# Altium PCB TwoMotor.PcbDoc
Units mil, origin at the board's own origin, x right, y up, seen from the top; angles counter-clockwise.
Board outline 2402.34 x 2195.03 mil, 2 copper layers (Top Layer, Bottom Layer); 38 components, 33 nets, 123 pads, 57 vias.
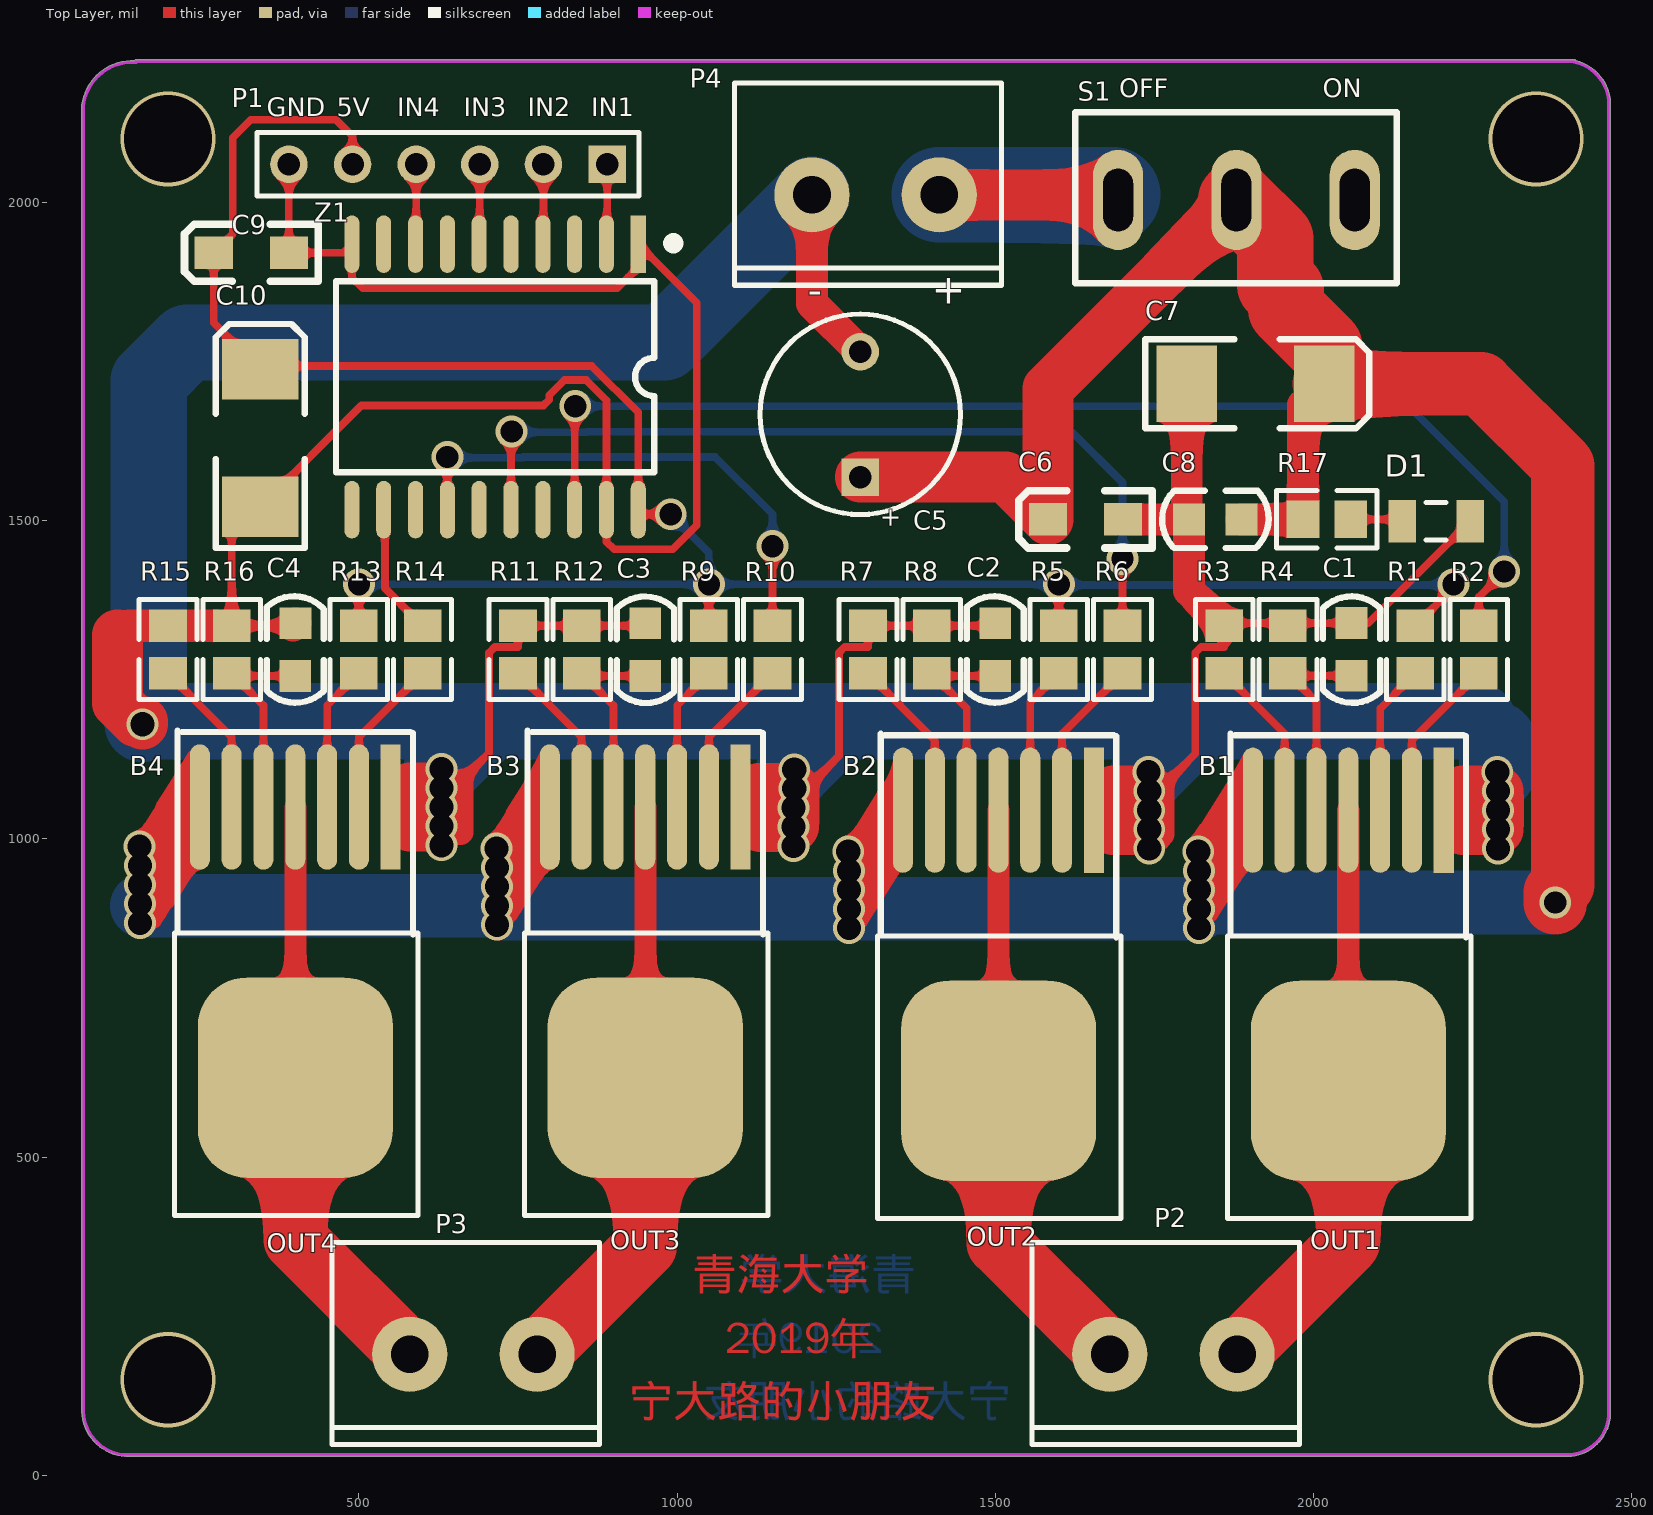
[diagram p0: Top Layer view]
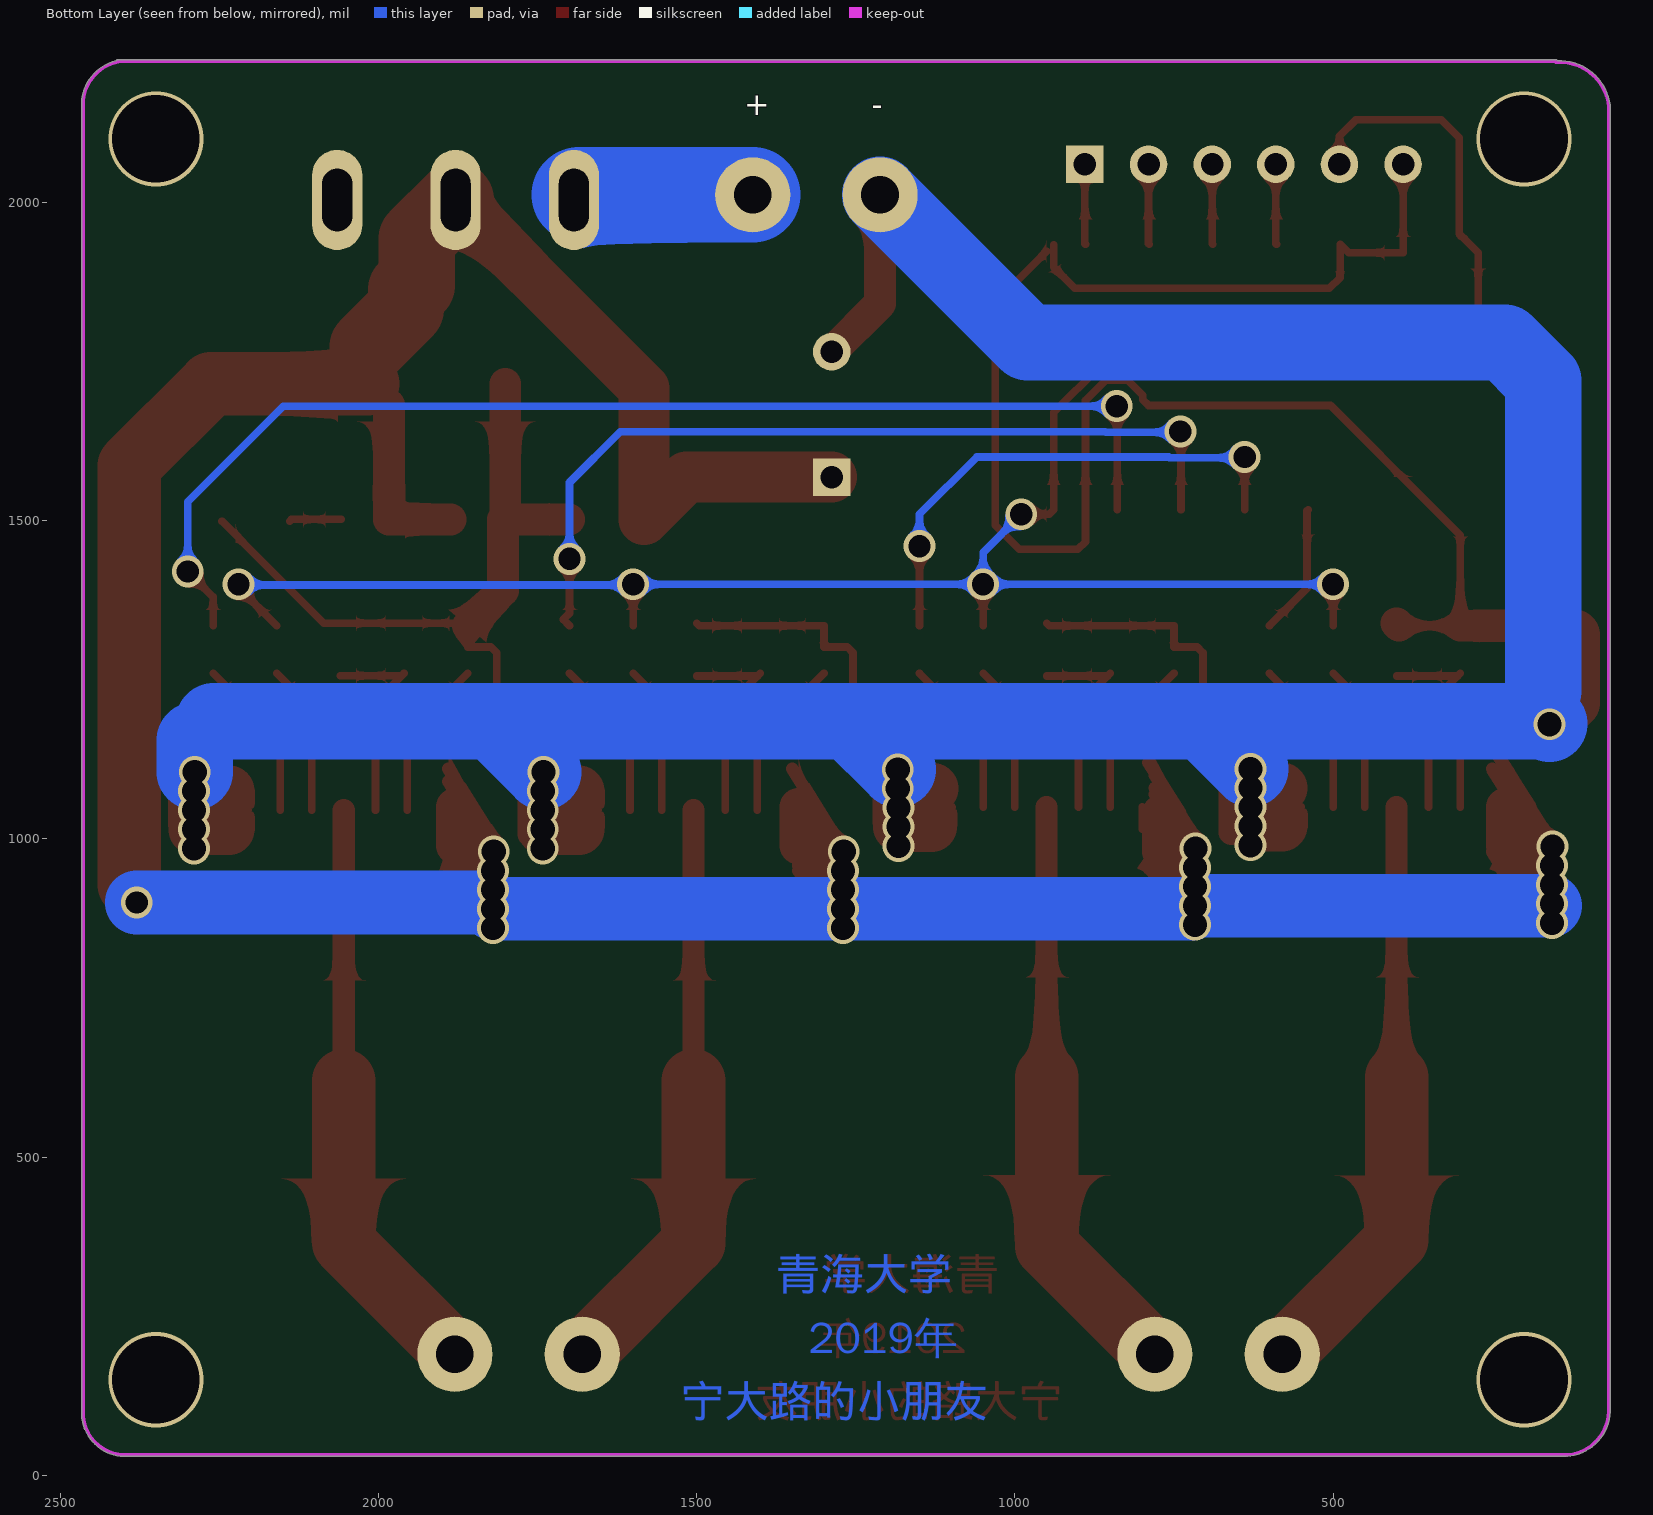
[diagram p1: Bottom Layer view, seen from below]
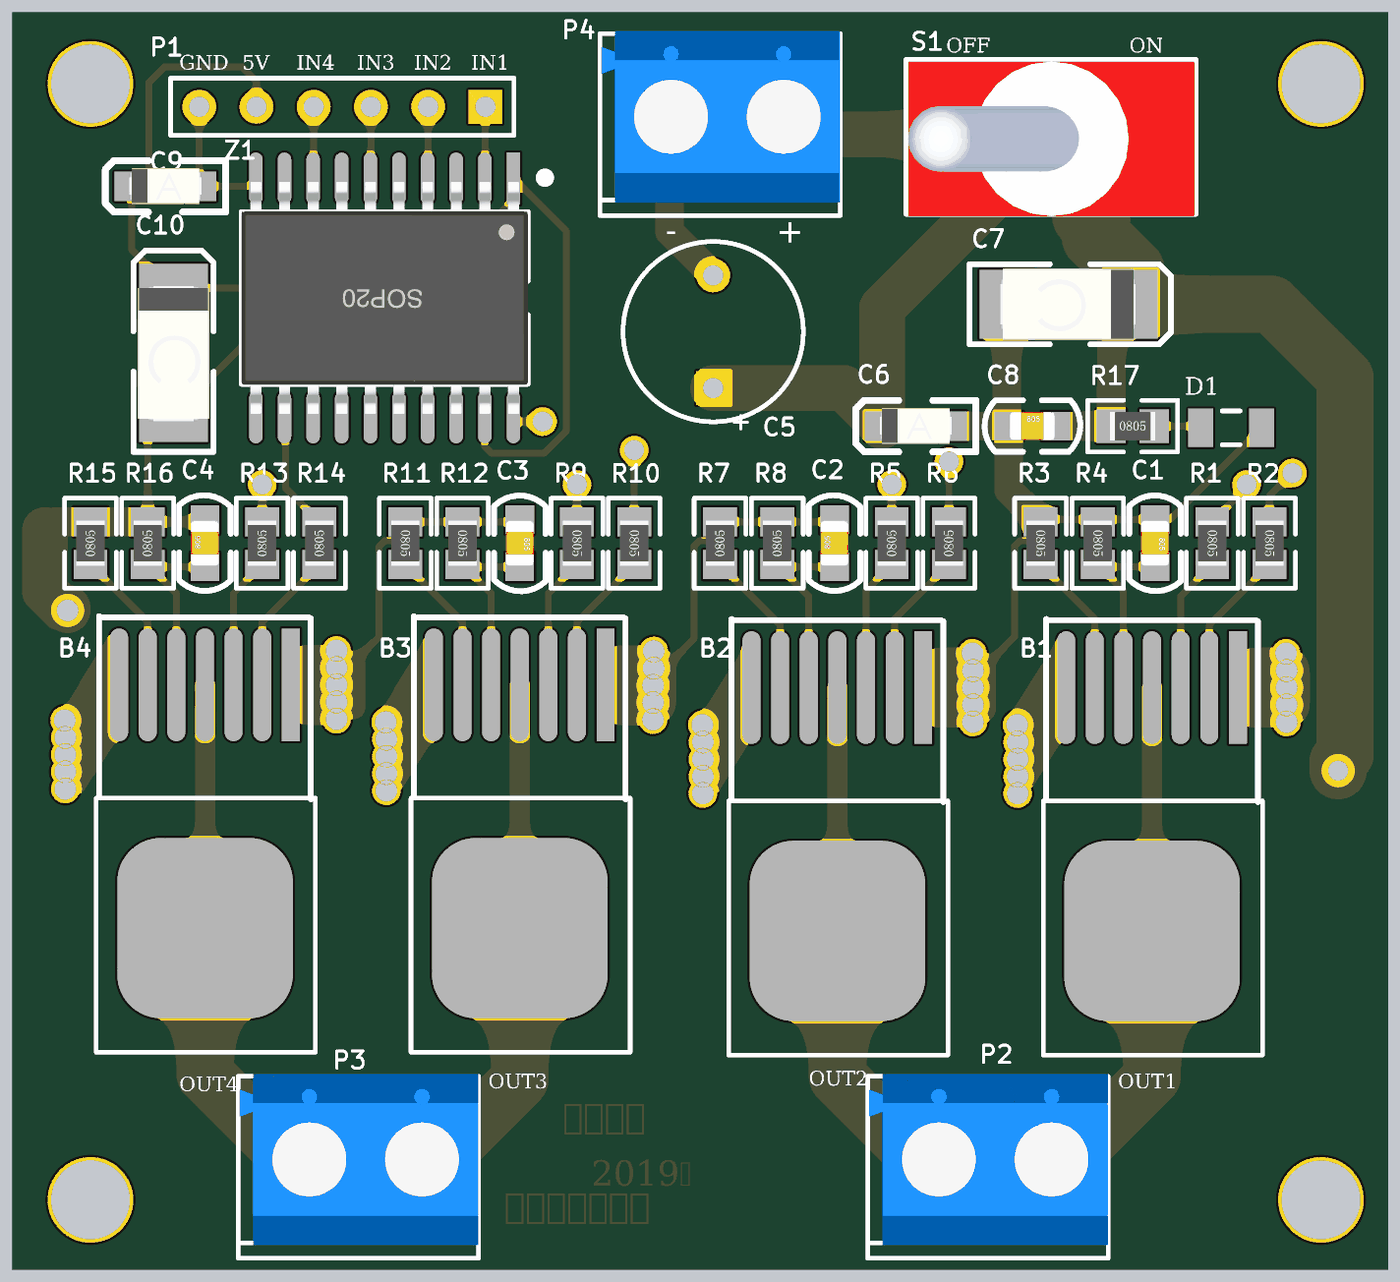
[diagram p2: 3D render of the assembled board from above, using the file's embedded part models]

## Layer stack, top to bottom
Top Solder: solder mask 0.4, Solder Resist, Dk 3.5
Top Layer: signal copper 1.4
Dielectric 1: dielectric 12.6, FR-4, Dk 4.8
Bottom Layer: signal copper 1.4
Bottom Solder: solder mask 0.4, Solder Resist, Dk 3.5

## Board outline
140.04,29.48 ccw(c137.5,102.5) 140.09,29.49 140.04,29.48 cw(c137.5,102.5) 64.49,99.91 cw(c67,100) 64.49,100 64.49,2139.02 cw(c66.8,2139.99) 64.29,2139.88 cw(c143.5,2143.5) 147.58,2222.69 cw(c150,2222) 150,2224.51 2410,2224.51 cw(c2410,2222) 2412.42,2222.7 cw(c2396,2154) 2466.28,2161.07 cw(c2464,2160) 2466.52,2160 2466.52,2158.07 cw(c2396,2154) 2466.63,2154 cw(c2396,2154) 2466.52,2149.93 2466.52,100.03 cw(c2398,98) 2466.55,98 cw(c2398,98) 2466.52,95.97 2466.52,90 cw(c2464,90) 2465.86,88.3 cw(c2398,98) 2400.08,29.49 cw(c2400,32) 2400,29.48

## Design rules (kind name [scope] priority, off if disabled: settings)
Clearance [All] p1: gap=10 ignorepadtopadclearanceinfootprint=FALSE except(0: Arc-Hole Track-Hole SMDPad-Hole THPad-Hole Via-Hole Fill-Hole Poly-Hole Region-Hole Text-Hole)
Height [All] p1: minheight=0 maxheight=2000 prefheight=500
HoleSize [All] p1: absolutevalues=TRUE maxlimit=2000 minlimit=1 maxpercent=80.000 minpercent=20.000
HoleToHoleClearance [All] p1 off: gap=10 allowstackedmicrovias=TRUE
MinimumSolderMaskSliver [All] p1: minsoldermaskwidth=1
PolygonConnect [All] p1: connectstyle=Relief reliefconductorwidth=10 reliefentries=4 polygonreliefangle="90 Angle" airgapwidth=10
RoutingVias [All] p1: holewidth=28 width=50 viastyle="Through Hole" minholewidth=28 minwidth=50 maxholewidth=28 maxwidth=50
SilkToSilkClearance [All] p1: silktosilkclearance=0
SilkToSolderMaskClearance [IsPad] p1: minsilkscreentomaskgap=1 clearancetoexposedcopper=TRUE
SolderMaskExpansion [All] p1: expansion=4
Width [All] p1: maxlimit=300 minlimit=10 preferedwidth=12
24 further rules are at their usual default settings.

## Components (designator, comment, footprint, x,y, rotation, side; value= is the part's Value field where it differs from the comment)
B1 "BTN7971B" BTN7971B 2069.8,770.1 r90 top
B2 "BTN7971B" BTN7971B 1520,770.1 r90 top
B3 "BTN7971B" BTN7971B 965,775 r90 top
B4 "BTN7971B" BTN7971B 415,775 r90 top
C1 "Cap Chip 0805" C0805 2060,1345 r270 top value=104
C2 "Cap Chip 0805" C0805 1500,1250 r90 top value=104
C3 "Cap Chip 0805" C0805 950.1,1344.7 r270 top value=104
C4 "Cap Chip 0805" C0805 400,1250 r90 top value=104
C5 "Cap Pol3" CAPPR5-8X11.5 1288,1667 r90 top value=470uF
C6 "Cap Pol3" C3216 1642,1502 r0 top value=0.1uF
C7 "Cap Pol3" C6032 1905,1716 r180 top value=10uF
C8 "Cap Chip 0805" C0805 1798.3,1502.1 r0 top value=104
C9 "Cap Pol3" C3216 331,1921 r0 top value=0.1uF
C10 "Cap Pol3" C6032 344,1626 r270 top value=10uF
D1 "LED2" C1206 2193,1499 r0 top
P1 "Header 6" HDR1X6 890,2060 r180 top
P2 "Header 2" 2PIN-5.08B 1880,190 r180 top
P3 "Header 2" 2PIN-5.08B 780,190 r180 top
P4 "Header 2" 2PIN-5.08B 1412,2012 r180 top
R1 "Res3" R0805 2160,1297.4 r270 top value=3.3k
R2 "Res3" R0805 2260,1297.4 r270 top value=3.3k
R3 "Res3" R0805 1860,1297.4 r270 top value=3.3k
R4 "Res3" R0805 1960,1297.4 r270 top value=3.3k
R5 "Res3" R0805 1600,1297.4 r90 top value=3.3k
R6 "Res3" R0805 1700,1297.4 r90 top value=3.3k
R7 "Res3" R0805 1300,1297.4 r90 top value=3.3k
R8 "Res3" R0805 1400,1297.4 r90 top value=3.3k
R9 "Res3" R0805 1050,1297.4 r270 top value=3.3k
R10 "Res3" R0805 1150,1297.4 r270 top value=3.3k
R11 "Res3" R0805 750,1297.4 r270 top value=3.3k
R12 "Res3" R0805 850,1297.4 r270 top value=3.3k
R13 "Res3" R0805 500,1297.4 r90 top value=3.3k
R14 "Res3" R0805 600,1297.4 r90 top value=3.3k
R15 "Res3" R0805 200,1297.4 r90 top value=3.3k
R16 "Res3" R0805 300,1297.4 r90 top value=3.3k
R17 "Res3" R0805 2021,1502 r0 top value=3.3k
S1 "SW-SPST" SW-TO3 1879,2004 r270 top
Z1 "74LS244" SOP20_M 714,1726 r270 top

## Footprints (in the part's own frame and the unit in brackets; to place one, negate y for a bottom-side part, rotate by r counter-clockwise, add the part's x,y. Pads: shape width x height; smd on the part's side, far side on the other; paste and mask are expansions set on the pad)
2PIN-5.08B [mm] "3A"
  round 3 hole 1.5: 1(0,0) 2(5.08,0)
  silkscreen extent -2.49,-4.47 8.18,3.61, body extent -2.48,-4.58 8.12,3.02, height 10
BTN7971B [mm] "BTN7971B"
  rect 5x0.8 smd: 1(6.985,-3.429)
  oval 5x0.8 smd: 2(6.985,-2.159) 3(6.985,-0.889) 4(6.985,0.381) 5(6.985,1.651) 6(6.985,2.921) 7(6.985,4.191)
  rrect50% 8x7.795 smd: 8(-3.813,0.376)
  silkscreen extent -9.32,-4.52 10.03,5.21
C0805 [mil]
  rect 50x50 smd: 1(6,0) 2(88.7,-0.1)
  silkscreen extent -36,-45 131,45, body extent 8,-24 87,25, height 30
C1206 [mm] "Chip Capacitor, Body 3.2x1.6mm, IPC High Density"
  rect 1.1x1.7 smd: 1(-1.35,0) 2(1.35,0)
  silkscreen extent -0.4,-0.75 0.4,0.75, body extent -1.7,-0.9 1.7,0.9, height 1.3
C3216 [mil] "A型/1206"
  rect 60x51.18 smd: 1(-59,0) 2(59,0)
  silkscreen extent -105,-45 105,45, body extent -63,-31 63,32, height 63
C6032 [mil] "C型"
  rect 95x120 smd: 1(-112,1) 2(104,1)
  silkscreen extent -183,-69 169,71, body extent -121,-62 115,64, height 102
CAPPR5-8X11.5 [mm]
  rect 1.5x1.5 hole 0.9: 1(-2.5,0)
  round 1.5 hole 0.9: 2(2.5,0)
  silkscreen extent -4,-4 4,4, body extent -4.05,-4.05 4.05,4.05, height 11.5
HDR1X6 [mm] "Connector; Header; 6 Position"
  rect 1.5x1.5 hole 0.9: 1(0,0)
  round 1.5 hole 0.9: 2(2.54,0) 3(5.08,0) 4(7.62,0) 5(10.16,0) 6(12.7,0)
  silkscreen extent -1.27,-1.27 13.97,1.27
R0805 [mm]
  rect 1.3x1.5 smd: 1(-0.95,0) 2(0.95,0)
  silkscreen extent -2,-1.15 2,1.15, body extent -1,-0.63 1,0.63, height 0.55
SOP20_M [mm] "13*10.6*2.6（长宽高）"
  rect 2.3x0.6 smd: 1(-5.3,5.715)
  oval 2.3x0.6 smd: 2(-5.3,4.445) 3(-5.3,3.175) 4(-5.3,1.905) 5(-5.3,0.635) 6(-5.3,-0.635) 7(-5.3,-1.905) 8(-5.3,-3.175) 9(-5.3,-4.445) 10(-5.3,-5.715) 11(5.3,-5.715) 12(5.3,-4.445) 13(5.3,-3.175) 14(5.3,-1.905) 15(5.3,-0.635) 16(5.3,0.635) 17(5.3,1.905) 18(5.3,3.175) 19(5.3,4.445) 20(5.3,5.715)
  silkscreen extent -5.49,-6.35 3.81,7.27, body extent -5.15,-6.35 5.15,6.35, height 2.7
SW-TO3 [mm]
  oval 4x2 hole 1.2 slot 2.5 at 0 deg: 1(0,-4.724) 2(0,0) 3(0,4.724)
  silkscreen extent -3.5,-6.43 3.33,6.39, body extent -3.43,-6.36 3.43,6.35, height 28.55

## Part data
C1 C2 C3 C4 C8: "Polarized Capacitor (Radial)", Published=8-Jun-2000, Publisher="Altium Limited", Revision="July-2002: Re-released for DXP Platform."
C5 C6 C7 C9 C10: "Polarized Capacitor (Surface Mount)", LatestRevisionDate=29-May-2009, LatestRevisionNote="IPC-7351 Footprint Added.", PackageDescription="Chip Capacitor", PackageReference=C0805, Published=8-Jun-2000, Publisher="Altium Limited"
D1: "Typical RED, GREEN, YELLOW, AMBER GaAs LED", LatestRevisionDate=17-Jul-2002, LatestRevisionNote="Re-released for DXP Platform.", PackageDescription="SM LED; 2 Flat Leads", PackageReference=3.2X1.6X1.1, PackageVersion=Feb-2002, Published=8-Jun-2000, Publisher="Altium Limited"
P1: "Header, 6-Pin", LatestRevisionDate=17-Jul-2002, LatestRevisionNote="Re-released for DXP Platform.", Publisher="Altium Limited"
P2 P3 P4: "Header, 2-Pin", LatestRevisionDate=17-Jul-2002, LatestRevisionNote="Re-released for DXP Platform.", Publisher="Altium Limited"
R1 R2 R3 R4 R5 R6 R7 R8 R9 R10 R11 R12 R13 R14 R15 R16 R17: "Resistor", LatestRevisionDate=29-May-2009, LatestRevisionNote="IPC-7351 Footprint Added.", PackageDescription="Chip Resistor", PackageReference=J1-0603, Published=8-Jun-2000, Publisher="Altium Limited"
S1: "Single-Pole, Single-Throw Switch", Published=24-Mar-1999, Publisher="Altium Limited", Revision="July-2002: Re-released for DXP Platform."
Z1: "SOP-20"

## Via types
v1: diameter 50, hole 38, Top Layer to Bottom Layer, 41 vias
v2: diameter 50, hole 35, Top Layer to Bottom Layer, 12 vias
v3: diameter 149.61, hole 137.8, Top Layer to Bottom Layer, 4 vias

## Nets (pads, with @x,y where several pads share a name; then routed paths per layer and width w, separated by ;. In a path a pad name is that pad's centre, name@x,y a point inside that pad or via, vN(x,y) a via of type N, cw(c..) or ccw(c..) an arc to the next point about the centre after c; other vN are vias at no path point)
5V: C9.1 C10.1 P1.5 R1.1 R5.2 R9.1 R13.2 Z1.20 | length 3659.2
  Top Layer w12: P1.5 490,2104 464,2130 330,2130 302,2102 302,1951 C9.1 272,1811 C10.1 350,1743 866.1,1743 939,1670.1 Z1.20 946.34,1510 v2(990,1510) ; R13.2 v2(500,1400) ; R9.1 v2(1050,1400) ; R5.2 v2(1600,1400) ; R1.1 2220,1394.8 v2(2220,1400)
  Bottom Layer w12: v2(500,1400) v2(1050,1400) ; v2(990,1510) 1050,1450 v2(1050,1400) ; v2(2220,1400) v2@2220,1410 ; v2(1050,1400) v2(1600,1400) 1601,1399 2209,1399 v2@2220,1410 ; v2@2220,1410 2222,1412 2220,1414 v2@2220,1410
GND: B1.1 B2.1 B3.1 B4.1 C1.1 C2.2 C3.1 C4.2 C5.2 C6.2 C7.2 C8.1 C9.2 C10.2 D1.2 P1.6 P4.2 R3.1 R4.1 R7.2 R8.2 R11.1 R12.1 R15.2 R16.2 Z1.1 Z1.10 Z1.19 | length 10710.6
  Top Layer w12: P1.6 C9.2 475.34,1921 Z1.10 489,1882 506,1865 906,1865 939,1898 939,1933.8 Z1.1@939.16,1933.83 ; C4.2@396.2,1334.8 R16.2 300,1477 C10.2 504,1681 790,1681 799,1690 799,1696.98 823.02,1721 856.98,1721 889,1688.98 Z1.19 889,1467 901,1455 992.98,1455 1031,1493.02 1031,1842.66 Z1.1@950,1923.66 ; B4.1 580,1020 ; 660,1090 704.47,1134.47 704.47,1292.22 713.84,1301.59 750,1301.59 R11.1 R12.1 946.2,1334.8 C3.1 ; v1@1204,1080 1254.47,1130.47 1254.47,1292.22 1263.84,1301.59 1300,1301.59 R7.2 R8.2 1496.2,1334.8 C2.2 ; 1684.9,1075 B2.1 1685.1,1015 ; v1@1762,1081 1814.47,1133.47 1814.47,1292.22 1823.85,1301.59 1860,1301.59 R3.1 1864.2,1339 C1.1 2086.15,1339 2178,1430.85 2178,1430.98 2246.02,1499 D1.2 ; C8.1@1797.6,1502 C8.1@1801,1505.4 ; 2234.7,1075 B1.1 2234.9,1015
  Top Layer w15: B3.1 1131,1019
  Top Layer w40: 660,1010 660,1050 660,1090 ; v1@1204,1026 v1@1204,1080 ; v1@1762,1007 1762,1045 v1@1762,1081 ; v1@2311,1022 v1@2311,1066
  Top Layer w50: 120.47,1320.47 134.8,1334.8 R15.2 R16.2 ; C4.2@396.2,1334.8 C4.2 ; P4.2 1212,1841.43 C5.2 ; C6.2 C8.1@1797.6,1502 ; C8.1@1801,1505.4 C7.2 ; C8.1 1804.3,1390.5 R3.1
  Top Layer w80: 120.47,1320.47 120.47,1213.7 149.76,1184.41 160,1184.41 v1@160,1180.47 ; 580,1020 v1(630,1020) ; 580,1080 v1(630,1080) ; 1129,1079 v1(1184,1079) ; 1131,1019 v1(1183,1019) ; 1684.9,1075 v1(1742,1075) ; 1685.1,1015 v1(1742,1015) ; 2234.7,1075 v1(2290,1075) ; 2234.9,1015 v1(2290,1015)
  Bottom Layer w12: v1(160,1180) 121,1180 120,1181 v1@160,1181 ; 702,1182 702,1185
  Bottom Layer w80: 1259,1184 1259,1185 ; 2259,1185 2289,1155
  Bottom Layer w120: v1@160,1181 164,1185 702,1185 1259,1185 1821,1185 ; 170,1233 170,1720 230,1780 980,1780 P4.2 ; v1(630,1110) 702,1182 ; v1(1184,1109) 1259,1184 ; v1(1741,1105) 1821,1185 ; 2259,1185 1821,1185 ; v1(2289,1105) 2289,1155
  other v1: 1742,985 2290,985 1183,989 630,990 1742,1045 2290,1045 1183,1049 630,1050
INT1: P1.1 Z1.2 | length 125.8
  Top Layer w12: Z1.2 890,1935.66 P1.1
INT2: P1.2 Z1.4 | length 125.8
  Top Layer w12: Z1.4 790,1935.66 P1.2
INT3: P1.3 Z1.6 | length 125.8
  Top Layer w12: Z1.6 690,1935.66 P1.3
INT4: P1.4 Z1.8 | length 125.8
  Top Layer w12: Z1.8 590,1935.66 P1.4
NetB1_2: B1.2 R2.2 | length 258.5
  Top Layer w12: B1.2 2154.8,1154.8 R2.2
NetB1_3: B1.3 R1.2 | length 237.8
  Top Layer w12: B1.3 2104.8,1204.8 R1.2
NetB1_5: B1.5 C1.2 R4.2 | length 329.7
  Top Layer w12: R4.2 R4.2@1963.7,1256.3 ; B1.5 2004.8,1215.2 R4.2@1963.7,1256.3 ; C1.2 R4.2@1963.7,1256.3
NetB1_6: B1.6 R3.2 | length 254.2
  Top Layer w12: R3.2 1954.8,1165.2 B1.6
NetB2_2: B2.2 R6.1 | length 254.3
  Top Layer w12: B2.2 1605,1165 R6.1
NetB2_3: B2.3 R5.1 | length 233.5
  Top Layer w12: B2.3 1555,1215 R5.1
NetB2_5: B2.5 C2.1 R8.1 | length 333.7
  Top Layer w12: R8.1 R8.1@1404,1256 ; B2.5 1455,1205 R8.1@1404,1256 ; C2.1 R8.1@1404,1256
NetB2_6: B2.6 R7.1 | length 258.4
  Top Layer w12: R7.1 1405,1155 B2.6
NetB3_2: B3.2 R10.2 | length 251.4
  Top Layer w12: B3.2 1050,1160 R10.2
NetB3_3: B3.3 R9.2 | length 230.7
  Top Layer w12: B3.3 1000,1210 R9.2
NetB3_5: B3.5 C3.2 R12.2 | length 326.7
  Top Layer w12: R12.2 R12.2@854,1256 ; B3.5 900,1210 R12.2@854,1256 ; C3.2 R12.2@854,1256
NetB3_6: B3.6 R11.2 | length 251.4
  Top Layer w12: R11.2 850,1160 B3.6
NetB4_2: B4.2 R14.1 | length 251.4
  Top Layer w12: B4.2 500,1160 R14.1
NetB4_3: B4.3 R13.1 | length 230.7
  Top Layer w12: B4.3 450,1210 R13.1
NetB4_5: B4.5 C4.1 R16.1 | length 326.7
  Top Layer w12: R16.1 R16.1@304,1256 ; B4.5 350,1210 R16.1@304,1256 ; C4.1 R16.1@304,1256
NetB4_6: B4.6 R15.1 | length 251.4
  Top Layer w12: R15.1 300,1160 B4.6
NetD1_1: D1.1 R17.2 | length 82.7
  Top Layer w12: R17.2 2136.85,1502 D1.1
NetP4_1: P4.1 S1.1 | length 557.3
  Top Layer w12: S1.1@1685,2012 S1.1
  Top Layer w80: P4.1 S1.1@1685,2012
  Bottom Layer w150: P4.1 S1.1@1685,2012
OUT1: B1.4 B1.8 P2.1 | length 927.7
  Top Layer w12: B1.8@2054.8,620.2 B1.8
  Top Layer w35: B1.8@2054.8,620.2 B1.4
  Top Layer w100: P2.1 2055,365 B1.8
OUT2: B2.4 B2.8 P2.2 | length 927.6
  Top Layer w12: B2.8@1505,620.2 B2.8
  Top Layer w35: B2.8@1505,620.2 B2.4
  Top Layer w100: B2.8 1505.2,364.8 P2.2
OUT3: B3.4 B3.8 P3.1 | length 930.6
  Top Layer w12: B3.4 B3.4@950.2,1049.8
  Top Layer w35: B3.8 B3.4@950.2,1049.8
  Top Layer w100: P3.1 950.2,360.2 B3.8
OUT4: B4.4 B4.8 P3.2 | length 934.6
  Top Layer w12: B4.4 B4.4@400.2,1049.8
  Top Layer w35: B4.8 B4.4@400.2,1049.8
  Top Layer w100: B4.8 400.2,369.8 P3.2
PWM1: R2.1 Z1.18 | length 1897
  Top Layer w12: Z1.18 839,1679 v2(840,1680) ; R2.1 2260,1380 v2(2300,1420)
  Bottom Layer w12: v2(840,1680) 2150,1680 2300,1530 v2(2300,1420)
PWM2: R6.2 Z1.16 | length 1350.5
  Top Layer w12: Z1.16 739,1639 v2(740,1640) ; R6.2 1710,1344.8 1700,1354.8 v2(1700,1440)
  Bottom Layer w12: v2(740,1640) 741,1639 856.98,1639 857.98,1640 1620,1640 1700,1560 v2(1700,1440)
PWM3: R10.1 Z1.14 | length 837.7
  Top Layer w12: Z1.14 v2(639,1600) ; R10.1 v2(1150,1460) ; v2(639,1600) 639,1609 648,1600 v2(639,1600)
  Bottom Layer w12: v2(639,1600) 640,1599 756.98,1599 757.98,1600 1060,1600 1150,1510 v2(1150,1460)
PWM4: R14.2 Z1.12 | length 207.8
  Top Layer w12: Z1.12 541,1515.34 541,1393.8 R14.2
VB: B1.7 B2.7 B3.7 B4.7 C5.1 C6.1 C7.1 C8.2 R17.1 S1.2 | length 8046.8
  Top Layer w12: B3.7@800,1015 B3.7 ; B2.7@1355,1013 B2.7 ; C7.1@1983.6,1681.6 C7.1
  Top Layer w20: v1@160,1000 210,1080 ; v1@180,870 230,950 ; 180,1030 208.65,1075.84 230,1110 ; 190,1050 206.85,1076.97 B4.7@240,1130 ; 200,900 B4.7@250,980 ; 200,1030 223.03,1066.85 B4.7@250,1110 ; v1@710,990 760,1070 ; v1@720,850 725.9,859.44 739.38,881.01 770,930 ; v1@730,990 776.63,1064.61 780,1070 ; v1@730,1000 772.13,1067.42 780,1080 ; 730,1020 763.15,1073.03 780,1100 ; 740,880 740.28,880.45 B3.7@790,960 ; 740,1040 761.35,1074.16 B3.7@790,1120 ; v1@1280,1000 1321.34,1066.14 1330,1080 ; v1@1290,870 1293.37,875.39 1340,950 ; 1300,1030 1322.24,1065.58 B2.7@1350,1110 ; v1@1810,980 v1@1812.53,984.04 ; v1@1820,1000 1870,1080 ; v1@1830,870 1836.18,879.89 1849.66,901.46 1880,950 ; v1@1840,880 B1.7@1890,960 ; 1840,1010 1873.98,1064.36 B1.7@1890,1090 ; 1840,1030 1864.99,1069.98 B1.7@1890,1110
  Top Layer w50: C8.2 R17.1 C7.1@1983.6,1681.6
  Top Layer w60: v1@170,910 v1@170,970 ; 190,930 190,990 ; 200,960 200,1020 ; 210,980 210,1040 ; 230,990 230,1050 ; v1@730,910 v1@730,970 ; 740,940 740,1000 ; 750,950 750,1010 ; 770,980 770,1040 ; v1@1280,900 v1@1280,960 ; 1300,930 1300,990 ; 1320,960 1320,1020 ; B2.7@1340,990 B2.7@1340,1050 ; v1@1830,910 v1@1830,970 ; v1@1840,930 v1@1840,990 ; 1860,960 1860,1020 ; 1880,990 1880,1050
  Top Layer w80: C5.1 1516.43,1568.57 C6.1 1583,1708 S1.2 ; 1940,1870 1950,1870 ; 1957,1833 1957,1863 ; C7.1 C7.1@2017,1773
  Top Layer w100: C7.1 2263.5,1715 2392,1586.5 2392,928.15 2380,916.15 v2(2380,900)
  Top Layer w120: S1.2 1940,1943 1940,1870 ; 1950,1870 1957,1863 ; 1957,1833 C7.1@2017,1773
  Bottom Layer w80: v1(156,898) v1@159,895 ; v1(717,895) v1@722,890 ; v1(1820,890) v1@1830,900
  Bottom Layer w100: v1@159,895 v1(717,895) ; v1@722,890 v1(1270,890) v1(1820,890) ; v1@1830,900 v2(2380,900)
  other v1: 1270,860 1820,860 717,865 156,868 1270,920 1820,920 717,925 156,928 1270,950 1820,950 717,955 156,958 1269,980 1819,980 716,985 155,988
pads on no net: S1.3 Z1.3 Z1.5 Z1.7 Z1.9 Z1.11 Z1.13 Z1.15 Z1.17
copper on no net:
  other v3: 200,150 2350,150 200,2100 2350,2100

## Keep-outs
Keep-Out Layer:
  lines w5: 66.8,2139.99 cw(c143.5,2143.5) 150,2220 ; 67,2139.99 67,100 ccw(c137.5,102.5) 140,32 2400,32 ccw(c2398,98) 2464,100 ; 150,2222 2410,2222 ; 2400,2222 cw(c2396,2154) 2464,2150 ; 2464,90 2464,2160

## Other copper
Top Layer:
  text "青海大学" at 1025,275 h86.61
  text "2019年" at 1075,175 h86.61
  text "宁大路的小朋友" at 925,75 h86.61
Bottom Layer:
  text "青海大学" at 1375,275 h86.61
  text "2019年" at 1325,175 h86.61
  text "宁大路的小朋友" at 1525,75 h86.61

## Silkscreen, mask and mechanical layers (free items; w line width, h text height)
Top Overlay:
  text "OFF" at 1695,2155 h50
  text "ON" at 2015,2155 h50
  text "GND" at 355,2125 h50
  text "5V" at 465,2125 h50
  text "IN4" at 560,2125 h50
  text "IN3" at 665,2125 h50
  text "IN2" at 765,2125 h50
  text "IN1" at 865,2125 h50
  text "-" at 1205,1825 h80
  text "+" at 1400,1825 h80
  text "OUT2" at 1455,350 h50
  text "OUT3" at 895,345 h50
  text "OUT1" at 1995,345 h50
  text "OUT4" at 355,340 h50
Bottom Overlay:
  text "-" at 1225,2125 h60
  text "+" at 1425,2125 h60

## Text inside footprints (layer, text, board x,y; h text height)
C5: Top Overlay "+" at 1348,1487 h30 r90